# EAGLE board atmega128_devboard (EAGLE 6.4), part 1 of 4
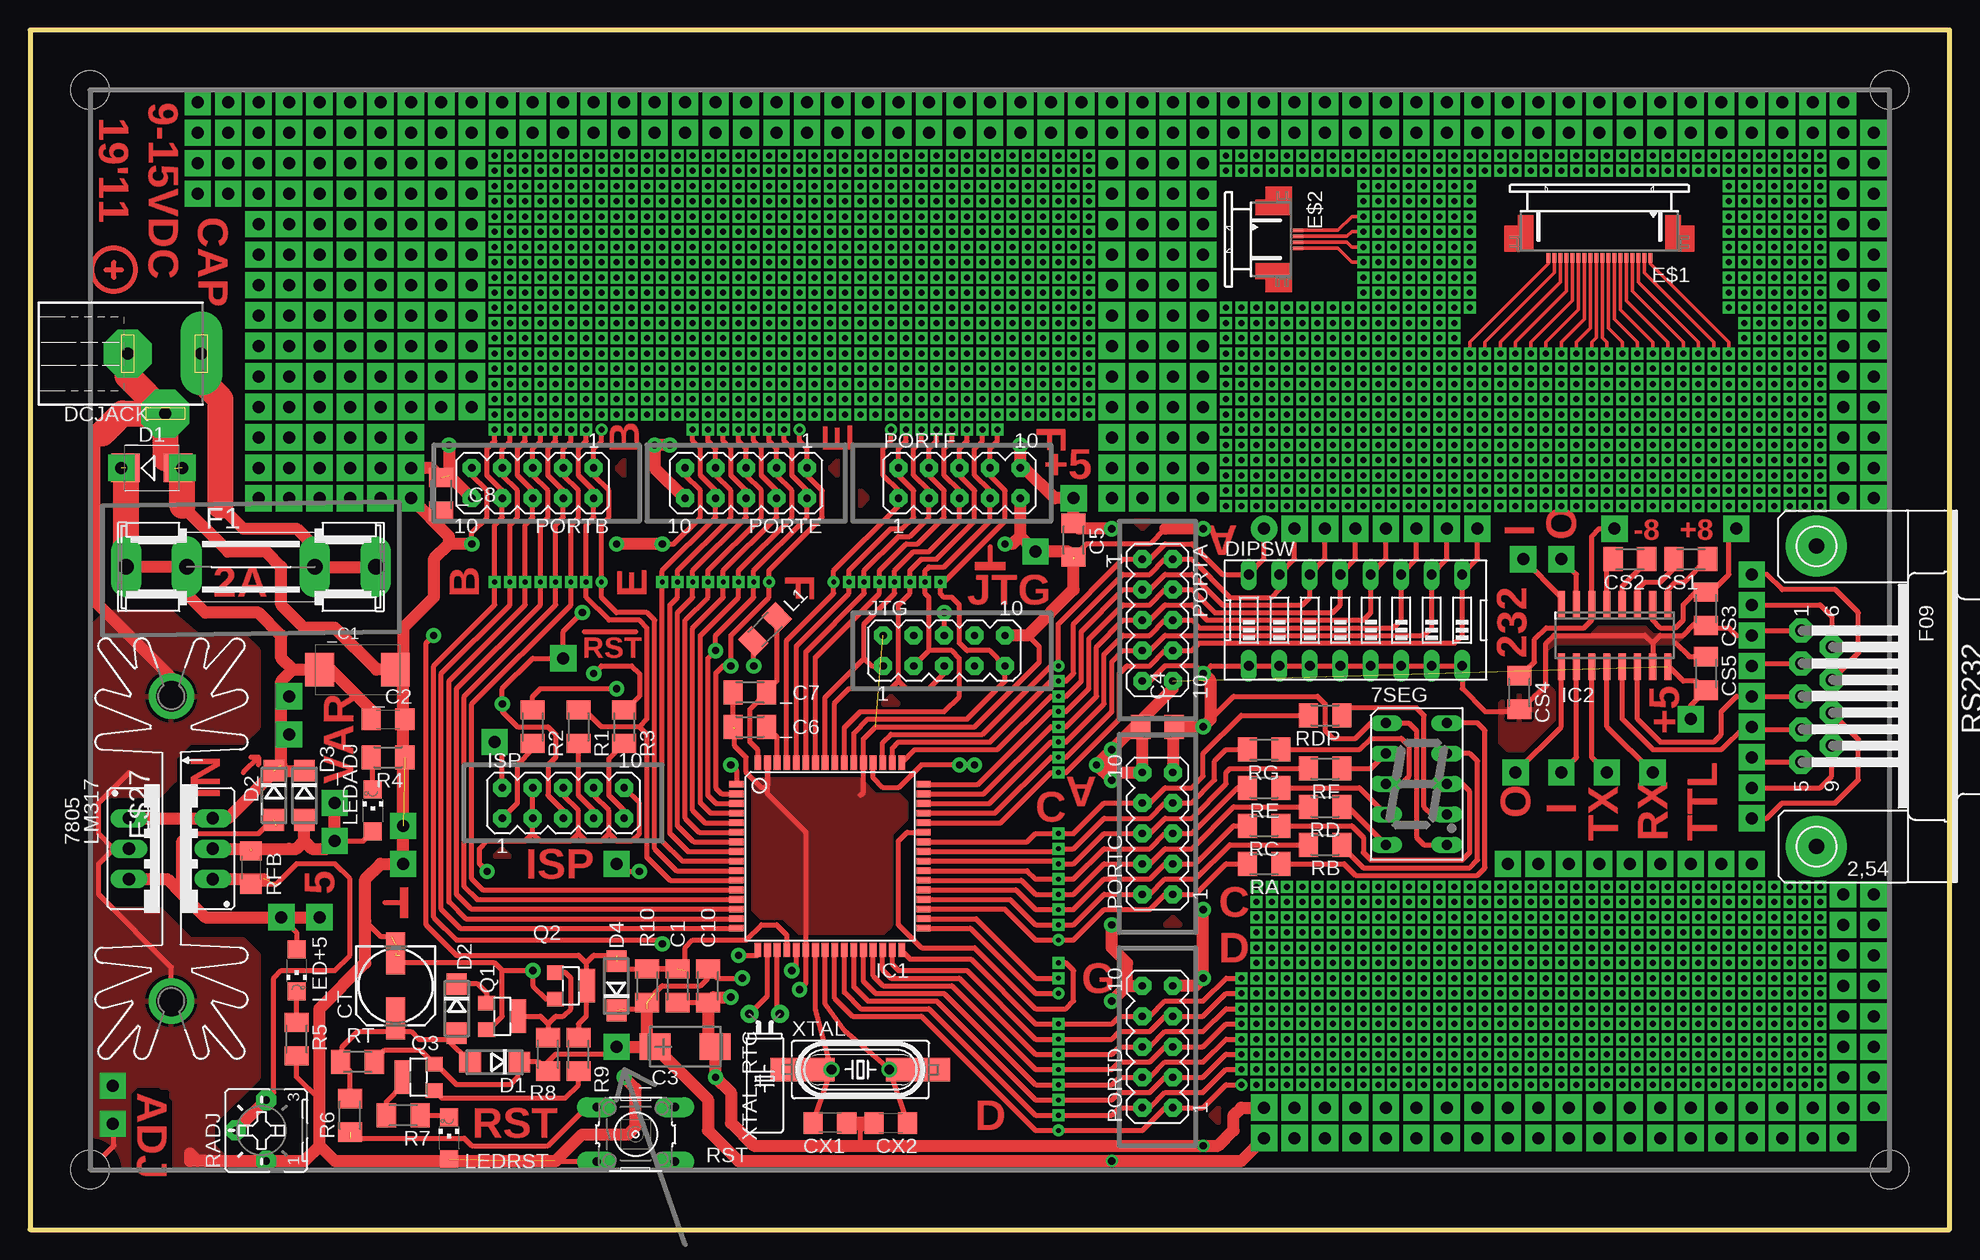
[diagram p0: board, top side]
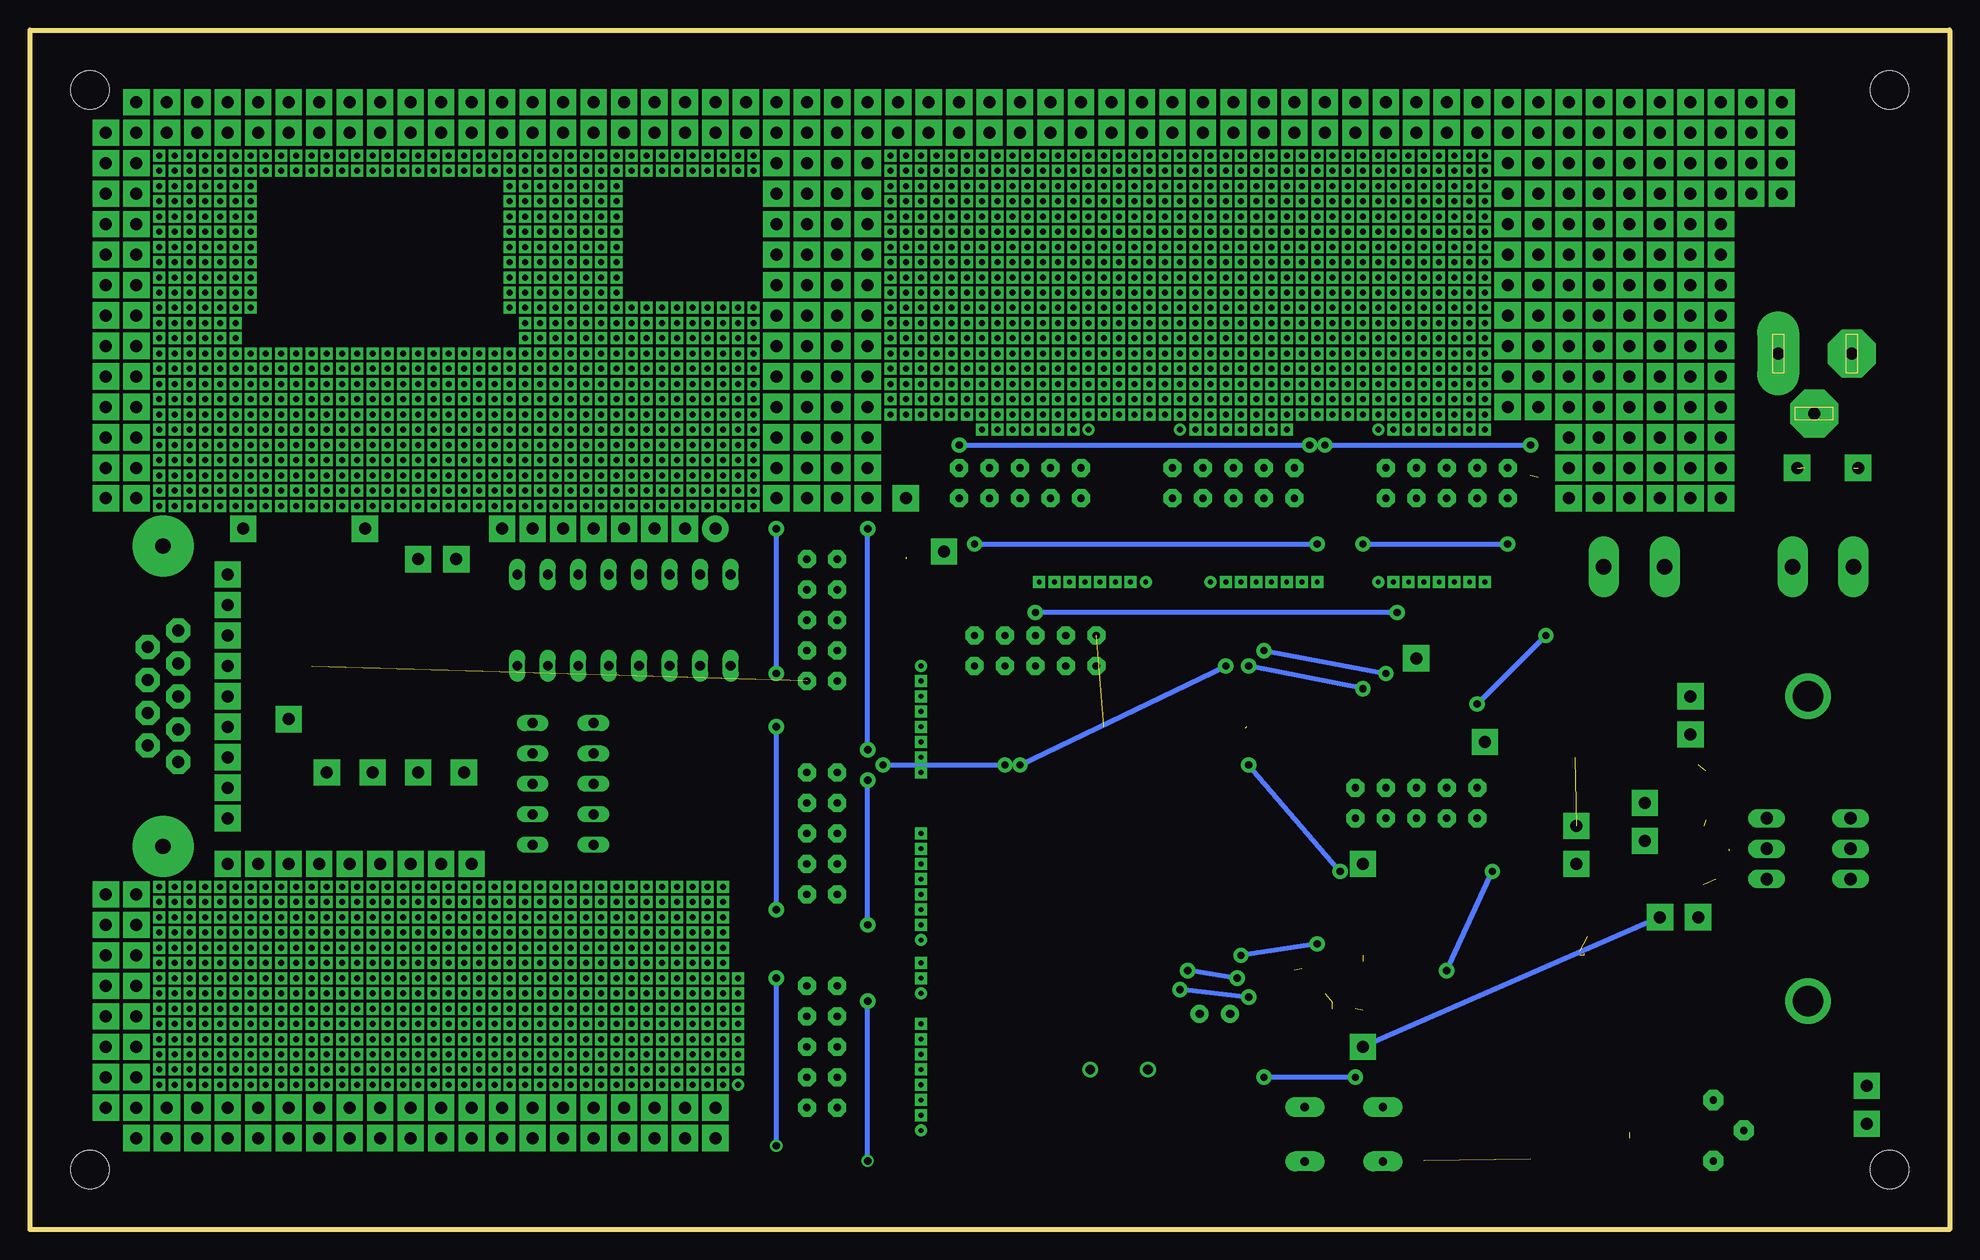
[diagram p1: board, bottom side, seen from below]

Size 160 x 100 mm. Coordinates in mm from the lower left corner, seen from the top.
Outline: 0,0 160,0 160,100 0,100 0,0
Copper layers (1*16): Top 0.035mm / dielectric 1.5mm / Bottom 0.035mm
Design rules "default *": minimum track width 10mil, minimum drill 24mil, track to track 8mil, track to pad 8mil, pad to pad 8mil, via to via 8mil, smd to smd 8mil, copper to edge 40mil, drill to drill 8mil, minimum pad ring 10mil, minimum via ring 8mil, stop-mask expansion 4mil, vias tented up to drill 0mil, thermal gap 10mil
Holes 3.2 mm at 5,5 155,5 5,95 155,95

## Footprints (pad centres in the part's own frame; a part is rotated, then mirrored left to right if it is on the bottom)
HDSP-A = drill 0.813 long: 1 -2.54,5.08; 2 -2.54,2.54; 3 -2.54,0; 4 -2.54,-2.54; 5 -2.54,-5.08; 6 2.54,-5.08; 7 2.54,-2.54; 8 2.54,0; 9 2.54,2.54; 10 2.54,5.08
78XXS = drill 1.016 long: GND 0,-2.54; IN -2.54,-2.54; OUT 2.54,-2.54
SMC_D = smd 2.4 x 2.8: + -3.15,0; - 3.15,0
C1206 = smd 1.6 x 1.8: 1 -1.4,0; 2 1.4,0
CT6032 = smd 2.6 x 2.2: + -2.5,0; - 2.5,0
M1206 = smd 1.6 x 2: 1 -1.4,0; 2 1.4,0
SMB = smd 2.4 x 2.4: A 2.2,0; C -2.2,0
DO214AC = smd 1.8 x 1.7: A 2.05,0; C -2.05,0
153CLV-0605 = smd 3.5 x 1.6: + 2.7,0; - -2.7,0
733980-62 = drill 1 pad 3.5 long: 1 0,8.57 | drill 1 pad 4 octagon: 2 0,2.42; 3 5,5.57
EDG-08 = drill 0.813 long: 1 -8.89,-3.81; 2 -6.35,-3.81; 3 -3.81,-3.81; 4 -1.27,-3.81; 5 1.27,-3.81; 6 3.81,-3.81; 7 6.35,-3.81; 8 8.89,-3.81; 9 8.89,3.81; 10 6.35,3.81; 11 3.81,3.81; 12 1.27,3.81; 13 -1.27,3.81; 14 -3.81,3.81; 15 -6.35,3.81; 16 -8.89,3.81
52745-1890 = smd 0.3 x 0.8: 1 -4.25,2.5; 2 -3.75,2.5; 3 -3.25,2.5; 4 -2.75,2.5; 5 -2.25,2.5; 6 -1.75,2.5; 7 -1.25,2.5; 8 -0.75,2.5; 9 -0.25,2.5; 10 0.25,2.5; 11 0.75,2.5; 12 1.25,2.5; 13 1.75,2.5; 14 2.25,2.5; 15 2.75,2.5; 16 3.25,2.5; 17 3.75,2.5; 18 4.25,2.5
52745-0490 = smd 0.3 x 0.8: 1 -0.75,2.5; 2 -0.25,2.5; 3 0.25,2.5; 4 0.75,2.5
HC49/S = drill 0.813: 1 -2.413,0; 2 2.413,0
SK104-PAD = drill 2.54 pad 3.81: K1 -12.7,-0.762; K2 12.7,-0.762
SHK20L = drill 1.321 pad 2.54 long: 1A -10.414,0; 1B -5.334,0; 2A 10.414,0; 2B 5.334,0
TQFP64 = smd 1.194 x 0.559: 1 -7.8,6; 2 -7.8,5.2; 3 -7.8,4.4; 4 -7.8,3.6; 5 -7.8,2.8; 6 -7.8,2; 7 -7.8,1.2; 8 -7.8,0.4; 9 -7.8,-0.4; 10 -7.8,-1.2; 11 -7.8,-2; 12 -7.8,-2.8; 13 -7.8,-3.6; 14 -7.8,-4.4; 15 -7.8,-5.2; 16 -7.8,-6; 33 7.8,-6; 34 7.8,-5.2; 35 7.8,-4.4; 36 7.8,-3.6; 37 7.8,-2.8; 38 7.8,-2; 39 7.8,-1.2; 40 7.8,-0.4; 41 7.8,0.4; 42 7.8,1.2; 43 7.8,2; 44 7.8,2.8; 45 7.8,3.6; 46 7.8,4.4; 47 7.8,5.2; 48 7.8,6 | smd 0.559 x 1.194: 17 -6,-7.8; 18 -5.2,-7.8; 19 -4.4,-7.8; 20 -3.6,-7.8; 21 -2.8,-7.8; 22 -2,-7.8; 23 -1.2,-7.8; 24 -0.4,-7.8; 25 0.4,-7.8; 26 1.2,-7.8; 27 2,-7.8; 28 2.8,-7.8; 29 3.6,-7.8; 30 4.4,-7.8; 31 5.2,-7.8; 32 6,-7.8; 49 6,7.8; 50 5.2,7.8; 51 4.4,7.8; 52 3.6,7.8; 53 2.8,7.8; 54 2,7.8; 55 1.2,7.8; 56 0.4,7.8; 57 -0.4,7.8; 58 -1.2,7.8; 59 -2,7.8; 60 -2.8,7.8; 61 -3.6,7.8; 62 -4.4,7.8; 63 -5.2,7.8; 64 -6,7.8
SOIC16N = smd 0.6 x 2.2: 1 -4.445,-2.6; 2 -3.175,-2.6; 3 -1.905,-2.6; 4 -0.635,-2.6; 5 0.635,-2.6; 6 1.905,-2.6; 7 3.175,-2.6; 8 4.445,-2.6; 9 4.445,2.6; 10 3.175,2.6; 11 1.905,2.6; 12 0.635,2.6; 13 -0.635,2.6; 14 -1.905,2.6; 15 -3.175,2.6; 16 -4.445,2.6
MA05-2 = drill 0.6 pad 1.5 octagon: 1 -5.08,-1.27; 2 -5.08,1.27; 3 -2.54,-1.27; 4 -2.54,1.27; 5 0,-1.27; 6 0,1.27; 7 2.54,-1.27; 8 2.54,1.27; 9 5.08,-1.27; 10 5.08,1.27
CHIPLED_1206 = smd 1.5 x 1.5: A 0,-1.75; C 0,1.75
317TS = drill 1.016 long: 1 -2.54,-2.54; 2 0,-2.54; 3 2.54,-2.54
SOT23-W = smd 1.2 x 1.4: 1 -1.1,-1.3; 2 1.1,-1.3 | smd 2.8 x 1.4: 3 0,1.3
B25P = drill 0.6 pad 1.676 octagon: A -2.54,0; E 2.54,0; S 0,2.54
F09HP = drill 1 pad 2 octagon: 1 -5.486,-1.27; 2 -2.743,-1.27; 3 0,-1.27; 4 2.743,-1.27; 5 5.486,-1.27; 6 -4.115,1.27; 7 -1.372,1.27; 8 1.372,1.27; 9 4.115,1.27 | drill 1.27 pad 5.08: G1 -12.522,0; G2 12.522,0
B3F-10XX = drill 0.7 pad 1.65 long: 1 -3.251,2.261; 2 3.251,2.261; 3 -3.251,-2.261; 4 3.251,-2.261
HC49UP = smd 5.334 x 1.93: 1 -4.826,0; 2 4.826,0
TC38H = drill 0.7 pad 1.5: 1 -1.27,0; 2 1.27,0

## Placement (x,y rotation side)
7SEG  [HDSP-A]  115.57,37.15 0 top
7805  [78XXS]  10.79,31.75 270 top
_C1  [SMC_D]  27.3,46.67 0 top
_C2  470  [C1206]  29.84,42.55 0 top
_C3  [CT6032]  54.61,15.24 0 top
_C4  100n  [M1206]  93.98,41.91 0 top
_C5  100n  [M1206]  87,57.47 270 top
_C6  [M1206]  60.01,41.91 180 top
_C7  [M1206]  60.01,44.77 0 top
_C8  100n  [M1206]  34.29,61.28 270 top
_D1  [SMB]  10.16,63.5 0 top
_D2  [DO214AC]  20.32,36.2 270 top
_D3  [DO214AC]  22.86,36.2 270 top
C1  10pF  [M1206]  53.98,20.32 90 top
C10  100n  [M1206]  56.52,20.32 270 top
CS1  100n  [M1206]  138.43,55.88 180 top
CS2  100n  [M1206]  133.35,55.88 180 top
CS3  100n  [M1206]  139.7,51.75 90 top
CS4  100n  [M1206]  124.14,44.77 270 top
CS5  100n  [M1206]  139.7,46.35 90 top
CT  47u  [153CLV-0605]  30.48,20.32 270 top
CX1  [C1206]  66.67,8.89 180 top
CX2  [C1206]  71.75,8.89 0 top
D1  d4  [DO214AC]  38.73,13.97 180 top
D2  d4  [DO214AC]  35.56,18.41 270 top
D4  d4  [DO214AC]  48.9,20.32 90 top
DCJACK  [733980-62]  5.71,73.03 270 top
DIPSW  [EDG-08]  110.49,50.8 0 top
E$1  [52745-1890]  130.81,83.5 180 top
E$2  [52745-0490]  103.19,82.55 270 top
E$6  [HC49/S]  69.22,13.34 180 top
E$27  [SK104-PAD]  12.54,31.75 270 top
F1  [SHK20L]  18.41,55.24 0 top
IC1  MEGA128-A  [TQFP64]  66.67,31.11 0 top
IC2  MAX202  [SOIC16N]  132.08,49.53 180 top
ISP  [MA05-2]  44.45,35.56 0 top
JTG  [MA05-2]  76.2,48.26 0 top
L1  [M1206]  61.28,50.03 45 top
LED+5  [CHIPLED_1206]  22.23,21.59 180 top
LEDADJ  [CHIPLED_1206]  28.57,34.92 0 top
LEDRST  [CHIPLED_1206]  34.92,7.62 0 top
LM317  [317TS]  12.7,31.75 90 top
PORTA  [MA05-2]  93.98,50.8 270 top
PORTB  [MA05-2]  41.91,62.23 180 top
PORTC  [MA05-2]  93.98,33.02 90 top
PORTD  [MA05-2]  93.98,15.24 90 top
PORTE  [MA05-2]  59.69,62.23 180 top
PORTF  [MA05-2]  77.47,62.23 0 top
Q1  BC337  [SOT23-W]  39.37,17.78 270 top
Q2  BC337  [SOT23-W]  45.09,20.32 270 top
Q3  BC327  [SOT23-W]  32.38,12.7 90 top
R1  470  [M1206]  45.72,41.91 90 top
R2  [M1206]  41.91,41.91 90 top
R3  [M1206]  49.53,41.91 90 top
R4  820  [M1206]  29.84,39.37 180 top
R5  270  [M1206]  22.23,15.88 270 top
R6  12  [M1206]  26.67,9.53 270 top
R7  240  [M1206]  31.11,9.53 0 top
R8  4k7  [M1206]  43.18,14.61 270 top
R9  4k7  [M1206]  45.72,14.61 270 top
R10  50k  [M1206]  51.44,20.32 90 top
RA  [M1206]  102.87,30.48 180 top
RADJ  5k  [B25P]  19.68,8.26 90 top
RB  [M1206]  107.95,32.07 180 top
RC  [M1206]  102.87,33.66 180 top
RD  [M1206]  107.95,35.24 180 top
RDP  [M1206]  107.95,42.86 180 top
RE  [M1206]  102.87,36.83 180 top
RF  [M1206]  107.95,38.42 180 top
RFB  470  [C1206]  18.41,30.16 270 top
RG  [M1206]  102.87,40.01 180 top
RS232  [F09HP]  148.91,44.45 270 top
RST  [B3F-10XX]  50.48,7.94 0 top
RT  100k  [M1206]  27.3,13.97 0 top
XTAL  20MHz  [HC49UP]  69.22,13.34 0 top
XTAL_RTC  [TC38H]  61.24,17.98 180 top

## Library data of the parts
7SEG = display-hp
7805 LM317 = v-reg
_C1-_C8 C1 C10 CS1-CS5 CT CX1 CX2 L1 R1-R10 RA RB RC RD RDP RE RF RFB RG RT = rcl
_D1-_D3 D1 D2 D4 Q1-Q3 = diode
DCJACK = con-conrad
DIPSW = special
E$1 E$2 = con-molex
E$6 XTAL_RTC = crystal
E$27 = heatsink
F1 = fuse
IC1 = atmel
IC2 = ref-packages
ISP JTG PORTA PORTB PORTC PORTD PORTE PORTF = con-lstb
LED+5 LEDADJ LEDRST = led
RADJ = pot
RS232 = con-subd
RST = switch-omron
XTAL = SparkFun

## Nets
#PEN: IC1.1
#RST: C1.2 D4.A IC1.20 ISP.5 JTG.6 Q2.3 R9.1 R10.2
AREF: _C6.1 IC1.62
DCD: RS232.5
DTR: RS232.2
GND: 7SEG.1 7SEG.6 7805.GND _C1.- _C3.- _C4.2 _C5.2 _C6.2 _C7.1 _D1.A C1.1 C10.2 CS3.1 CS4.2 CS5.2 CT.- CX1.1 CX2.1 DCJACK.2 DCJACK.3 DIPSW.1 DIPSW.2 DIPSW.3 DIPSW.4 DIPSW.5 DIPSW.6 DIPSW.7 DIPSW.8 E$27.K1 E$27.K2 IC1.22 IC1.53 IC1.63 IC2.15 ISP.3 ISP.4 ISP.6 ISP.8 ISP.10 JTG.2 JTG.10 LEDRST.A PORTA.9 PORTB.9 PORTC.9 PORTD.9 PORTE.9 PORTF.9 Q1.2 Q2.2 R4.1 R5.2 RADJ.A RS232.1 RST.3
MISO: ISP.9 R3.1
MOSI: ISP.1 R2.1
PB0: IC1.10
PB1: IC1.11 PORTB.2 R1.2
PB2: IC1.12 PORTB.3
PB3: IC1.13 PORTB.4
PB4: IC1.14 PORTB.5
PB5: IC1.15 PORTB.6
PB6: IC1.16 PORTB.7
PB7: IC1.17 PORTB.8
PE0: IC1.2 PORTE.1 R2.2
PE1: IC1.3 PORTE.2 R3.2
PE2: IC1.4 PORTE.3
PE3: IC1.5 PORTE.4
PE4: IC1.6 PORTE.5
PE5: IC1.7 PORTE.6
PE6: IC1.8 PORTE.7
PE7: IC1.9 PORTE.8
PG0: IC1.33
PG1: IC1.34
PG2: IC1.43
RX_TTL: IC2.12
S$1: CX1.2 E$6.2 IC1.23
S$2: CX2.2 E$6.1 IC1.24
S$3: IC1.19 XTAL_RTC.1
S$4: IC1.18 XTAL_RTC.2
S$6: PORTD.1
S$8: IC1.59 PORTF.3
S$9: IC1.60 PORTF.2
S$11: PORTC.7 RG.2
S$23: LM317.1 RADJ.E RADJ.S RFB.2
S$27: _C7.2 IC1.64 L1.2
S$44: DIPSW.9 IC1.44 PORTA.8
S$47: DIPSW.13 IC1.48 PORTA.4
S$55: E$1.1
S$56: E$1.2
S$57: PORTC.6 RF.2
S$58: IC1.57 JTG.1 PORTF.5
S$59: IC1.56 JTG.5 PORTF.6
S$60: IC1.55 JTG.3 PORTF.7
S$61: IC1.54 JTG.9 PORTF.8
S$62: IC1.26
S$63: IC1.25
S$64: IC1.27
S$65: IC1.28
S$66: IC1.29
S$67: IC1.32
S$68: IC1.31
S$69: IC1.30
S$70: IC1.35
S$71: IC1.36
S$72: IC1.37
S$73: IC1.38
S$74: IC1.39
S$75: IC1.40
S$76: IC1.41
S$77: IC1.42
S$78: DIPSW.10 IC1.45 PORTA.7
S$82: DCJACK.1 F1.2A F1.2B
S$83: 7805.IN _C1.+ _C2.1 _D1.C _D2.C _D3.C F1.1A F1.1B LM317.3
S$85: DIPSW.11 IC1.46 PORTA.6
S$86: DIPSW.12 IC1.47 PORTA.5
S$87: PORTC.5 RE.2
S$88: PORTC.4 RD.2
S$89: PORTC.3 RC.2
S$90: PORTC.2 RB.2
S$91: PORTC.1 RA.2
S$92: IC1.61 PORTF.1
S$93: E$1.3
S$99: IC1.58 PORTF.4
S$100: PORTC.8 RDP.2
S$101: PORTD.2
S$102: PORTD.3
S$103: PORTD.4
S$104: PORTD.5
S$105: PORTD.6
S$106: PORTD.7
S$108: E$1.4
S$109: PORTD.8
S$110: Q1.3 Q2.1 R8.1
S$117: CT.+ D1.A D2.A R6.1 RT.1
S$128: E$1.5
S$130: E$1.6
S$131: E$1.7
S$138: IC2.13 RS232.4
S$139: IC2.14 RS232.3
S$140: CS1.1 IC2.1
S$141: CS1.2 IC2.3
S$167: LED+5.C R5.1
S$168: R6.2 RST.1
S$169: LEDRST.C R7.2
S$170: E$1.8
S$174: E$1.9
S$176: CS2.1 IC2.4
S$177: CS2.2 IC2.5
S$178: CS3.2 IC2.2
S$179: CS4.1 IC2.6
S$181: RS232.7
S$183: RS232.6
S$184: RS232.8
S$185: IC2.8
S$192: RS232.9
S$240: E$1.10
S$242: E$1.11
S$243: E$1.12
S$244: E$1.13
S$245: E$1.14
S$246: E$1.15
S$247: E$1.16
S$248: E$1.17
S$249: E$1.18
S$250: E$2.1
S$251: E$2.2
S$252: E$2.3
S$253: E$2.4
S$257: DIPSW.16 IC1.51 PORTA.1
S$258: IC2.7
S$260: DIPSW.15 IC1.50 PORTA.2
S$261: DIPSW.14 IC1.49 PORTA.3
S$277: LEDADJ.C R4.2
S$283: Q3.1 R9.2
S$285: Q3.3 R7.1
S$296: IC2.10
S$297: IC2.9
S$302: _D3.A LEDADJ.A LM317.2 RFB.1
S$307: 7SEG.10 RA.1
S$308: 7SEG.9 RB.1
S$309: 7SEG.7 RDP.1
S$310: 7SEG.8 RC.1
S$311: 7SEG.5 RD.1
S$312: 7SEG.4 RE.1
S$313: 7SEG.2 RF.1
S$314: 7SEG.3 RG.1
S$497: D2.C Q1.1
SCK: ISP.7 R1.1
TX_TTL: IC2.11
VCC: 7805.OUT _C3.+ _C4.1 _C5.1 _C8.1 _D2.A C10.1 CS5.1 D1.C D4.C IC1.21 IC1.52 IC2.16 L1.1 LED+5.A PORTA.10 PORTB.10 PORTC.10 PORTD.10 PORTE.10 PORTF.10 Q3.2 R8.2 R10.1 RT.2
VTG: ISP.2

## Tracks (layer width: path | path; a pad name or v marks a point on that pad's centre or on a via)
#PEN  (via drill 0.6 pad 1.27, 1 pad 2.18)
  Top 0.406: IC1.1 58.88,38.28 v58.42,38.73 | v50.8,29.84 49.53,29.84 v48.9,30.48
  Bottom 0.406: v50.8,29.84 v58.42,38.73
#RST  (via drill 0.6 pad 1.27, 1 pad 2.18)  (2 unrouted)
  Top 0.406: IC1.20 63.08,24.55 62.23,25.4 60.96,25.4 59.69,24.13 55.24,24.13 54.61,23.5 54.61,21.59 | ISP.5 44.45,34.92 43.18,36.2 43.18,38.73 43.81,39.37 43.81,41.27 43.18,41.91 40.64,41.91 39.37,43.18 v39.37,43.81 39.37,45.09 41.91,47.62 v44.45,47.62 44.45,49.85 v46.04,51.44 | v76.2,51.44 JTG.6 | R9.1 45.72,17.14 46.35,17.78 46.35,20.29 Q2.3 46.38,20.93 46.35,20.95 46.35,22.23 | R10.2 C1.2 49.55,21.72 D4.A | 48.9,22.86 46.99,22.86 46.35,22.23 | 46.35,22.23 45.72,22.86 35.56,22.86 33.02,25.4 33.02,48.9 v33.66,49.53
  Bottom 0.406: v46.04,51.44 v76.2,51.44 | v33.66,49.53 v39.37,43.81
AREF
  Top 0.406: IC1.62 62.27,41.04 _C6.1
DCD
  Top 0.406: RS232.5 143.92,38.96 143.51,39.37
DTR
  Top 0.406: RS232.2 143.71,47.19 143.51,46.99
GND  (via drill 0.6, 0.6 pad 1.27, 1 pad 2.18)  (10 unrouted)
  Top 0.406: PORTB.9 36.83,62.87 38.1,61.59 38.1,59.37 36.83,58.1 v36.83,57.15 | 69.22,36.2 69.47,36.45 IC1.53 69.47,40.9 70.48,41.91 78.74,41.91 84.14,47.31 84.14,48.58 83.19,49.53 | PORTE.9 54.61,62.87 55.88,61.59 55.88,59.37 53.66,57.15 v52.7,57.15 | 135.25,48.9 135.89,49.53 137.79,49.53 138.75,50.48 138.94,50.48 CS3.1 139.89,50.16 141.6,50.16 142.24,49.53 v143.51,49.53 143.92,49.94 RS232.1 | 135.25,48.9 IC2.15 | 135.25,48.9 134.62,49.53 127,49.53 126.36,48.9 126.36,45.27 CS4.2 123.95,43.18 121.28,43.18 119.38,45.09 DIPSW.8 DIPSW.7 DIPSW.6 DIPSW.5 DIPSW.4 DIPSW.3 DIPSW.2 DIPSW.1 98.42,46.99 v97.79,46.35 97.16,46.99 94.61,46.99 93.34,45.72 PORTA.9 | 7SEG.6 116.2,32.07 115.57,32.7 115.57,41.59 114.94,42.23 7SEG.1 111.76,42.23 110.49,40.96 108.58,40.96 107.95,41.59 107.95,43.81 107.31,44.45 100.33,44.45 v97.79,41.91 | _C5.2 88.08,57.15 93.34,57.15 94.61,58.42 | Q2.2 43.01,19.22 41.91,20.32 v41.91,21.59 39.37,21.59 | Q1.2 38.27,16.68 39.37,17.78 39.37,21.59 | 69.22,8.26 69.85,8.89 | 69.22,8.26 68.58,8.89 | 69.22,6.99 69.22,8.26 | 39.37,21.59 38.73,22.23 31.11,22.23 30.48,22.86 | 57.15,15.28 _C3.- | 30.8,22.86 30.8,23.18 | 30.16,24.45 29.21,24.45 27.94,25.72 | RST.3 43.85,5.68 43.81,5.71 | R5.2 22.23,12.7 24.13,10.79 | 8.26,38.1 5.71,35.56 5.71,33.02 6.99,31.75 | 6.99,31.75 7805.GND | 6.99,31.75 5.71,30.48 5.71,27.94 11.78,21.87 E$27.K2 | _C6.2 _C7.1 | 58.74,41.78 58.74,40.32 59.69,39.37 59.69,38.1 60.96,36.83 61.28,36.83 61.48,37.03 IC1.63 61.48,36.31 64.67,33.12 IC1.22 64.67,20.54 v64.14,20 | C1.1 C10.2 | CS5.2 138.3,47.76 137.16,48.9 | 45.72,33.02 45.72,34.92 44.45,36.2 ISP.6
  Top 0.406: ISP.10 50.8,35.56 50.8,33.02 50.16,32.38 48.9,32.38 48.26,33.02 | 45.72,33.02 46.35,32.38 47.62,32.38 48.26,33.02 | ISP.8 46.99,36.2 48.26,34.92 48.26,33.02 | 41.91,33.02 42.55,32.38 45.09,32.38 45.72,33.02 | 41.91,33.02 41.27,32.38 38.1,32.38 37.47,31.75 37.47,30.48 v38.1,29.84 | ISP.4 ISP.3 41.91,33.02 | 5.08,5.08 6.99,6.99 6.99,9.53
  Top 1.016: 31.11,46.99 31.11,50.16 33.66,52.7 33.66,55.88 34.92,57.15 | v31.75,60.96 34.92,57.78 34.92,57.15 | v36.83,57.15 34.92,57.15 | v52.7,57.15 v48.9,57.15 | v81.28,57.15 81.92,57.15 82.55,57.78 | JTG.10 83.19,49.53 87,53.34 87,55.88 | 82.55,57.78 PORTF.9 | 82.55,57.78 v83.82,56.52 86.55,56.52 _C5.2 | v97.79,58.42 94.61,58.42 | 11.29,64.28 12.06,63.5 | v97.79,46.35 98.42,45.72 98.42,42.55 v97.79,41.91 _C4.2 95.25,41.78 PORTC.9 | v102.87,10.16 100.97,10.16 100.33,9.53 100.33,8.26 99.06,6.99 v97.79,6.99 69.22,6.99 60.33,6.99 58.42,8.89 58.42,11.43 v57.15,12.7 57.15,15.28 | 12.7,60.33 16.51,56.52 19.68,56.52 20.95,55.24 20.95,52.07 22.86,50.16 25.4,50.16 28.89,46.67 _C1.- 31.11,46.04 v31.11,33.66 v31.11,30.48 29.21,30.48 27.94,29.21 27.94,25.72 27.94,22.23 24.13,18.41 24.13,10.79 24.13,6.99 | PORTD.9 97.16,20.32 v97.79,20.95 v97.79,26.67 | CX1.1 68.58,8.89 69.85,8.89 CX2.1 | v49.53,12.7 50.48,11.75 50.48,8.57 49.85,7.94 46.04,7.94 43.81,5.71 25.4,5.71 24.13,6.99 | 24.13,6.99 22.86,5.71 RADJ.A 14.61,5.71 13.97,5.71 | 5.4,66.36 5.4,52.39 11.75,46.03 11.75,44.76 | v58.42,19.37 56.96,19.37 C10.2 56.52,15.88 | 13.97,5.71 13.34,6.35 13.34,5.71 13.97,5.71
  Top 2.184: 6.03,66.36 7.7,68.03 DCJACK.3 | DCJACK.2 8.13,71.17 DCJACK.3 | DCJACK.3 11.29,64.28 | _D1.A 12.7,63.16 12.7,60.33
  Bottom 0.406: v48.9,57.15 v36.83,57.15 | v81.28,57.15 v52.7,57.15 | v97.79,46.35 v97.79,58.42 | v97.79,26.67 v97.79,41.91 | v41.91,21.59 v38.1,29.84 | v97.79,6.99 v97.79,20.95 | v49.53,12.7 v57.15,12.7 | v58.42,19.37 v64.14,20
  other vias: 6.91,8.81 6.91,11.98 12.7,63.5
  pour Top (no thermals): 70.48,36.2 69.22,37.47 60.96,37.47 60.33,36.83 60.33,26.67 60.96,26.04 62.87,26.04 64.14,24.77 71.12,24.77 71.75,25.4 71.75,33.02 73.03,34.29 73.03,35.56 72.39,36.2
  pour Top: 11.75,51.44 6.35,51.44 5.08,50.16 5.08,37.47 6.35,36.2 10.79,36.2 12.06,37.47 12.06,39.37 13.34,40.64 17.78,40.64 19.05,41.91 19.05,48.26 17.78,49.53 13.97,49.53
  pour Top: 5.08,37.47 5.08,6.35 6.35,5.08 8.26,5.08 8.26,11.43 8.89,12.06 10.79,12.06 12.06,10.79 12.06,5.08 17.14,5.08 15.24,6.99 15.24,8.89 19.05,12.7 19.05,22.86 17.78,24.13 13.34,24.13 10.79,26.67 6.99,26.67 5.71,27.94 5.71,30.48 6.99,31.75 5.71,33.02 5.71,35.56 6.35,36.2
  pour Top: 130.18,49.53 130.81,50.16 134.62,50.16 135.25,49.53 137.79,49.53 137.16,48.9 127,48.9 126.36,48.26 126.36,48.9 127,49.53
  pour Top: 123.19,44.45 122.56,43.81 122.56,40.64 123.19,40.01 124.46,40.01 127,42.55 127,44.77 126.36,45.4 125.41,44.45
GND1  (via drill 1 pad 2.18)
  other vias: 105.41,10.16
GND2  (via drill 1 pad 2.18)
  other vias: 107.95,10.16
GND3  (via drill 1 pad 2.18)
  other vias: 110.49,10.16
GND5  (via drill 1 pad 2.18)
  other vias: 115.57,10.16
GND13  (via drill 1 pad 2.18)
  other vias: 120.65,10.16
GND14  (via drill 1 pad 2.18)
  other vias: 153.67,27.94
GND15  (via drill 1 pad 2.18)
  other vias: 153.67,25.4
GND16  (via drill 1 pad 2.18)
  other vias: 153.67,22.86
GND17  (via drill 1 pad 2.18)
  other vias: 153.67,20.32
GND18  (via drill 1 pad 2.18)
  other vias: 128.27,10.16
GND19  (via drill 1 pad 2.18)
  other vias: 153.67,17.78
GND20  (via drill 1 pad 2.18)
  other vias: 153.67,15.24
GND22  (via drill 1 pad 2.18)
  other vias: 148.59,10.16
GND23  (via drill 1 pad 2.18)
  other vias: 128.27,7.62
GND24  (via drill 1 pad 2.18)
  other vias: 148.59,7.62
GND56  (via drill 1 pad 2.18)
  other vias: 135.89,7.62
GND65  (via drill 1 pad 2.18)
  other vias: 138.43,7.62
GND74  (via drill 1 pad 2.18)
  other vias: 140.97,7.62
GND83  (via drill 1 pad 2.18)
  other vias: 143.51,7.62
GND92  (via drill 1 pad 2.18)
  other vias: 97.79,73.66
GND93  (via drill 1 pad 2.18)
  other vias: 97.79,71.12
GND94  (via drill 1 pad 2.18)
  other vias: 97.79,68.58
GND95  (via drill 1 pad 2.18)
  other vias: 97.79,66.04
GND96  (via drill 1 pad 2.18)
  other vias: 97.79,78.74
GND97  (via drill 1 pad 2.18)
  other vias: 97.79,76.2
GND98  (via drill 1 pad 2.18)
  other vias: 92.71,73.66
GND99  (via drill 1 pad 2.18)
  other vias: 92.71,71.12
GND100  (via drill 1 pad 2.18)
  other vias: 92.71,68.58
GND101  (via drill 1 pad 2.18)
  other vias: 92.71,66.04
GND102  (via drill 1 pad 2.18)
  other vias: 92.71,78.74
GND103  (via drill 1 pad 2.18)
  other vias: 92.71,76.2
GND104  (via drill 1 pad 2.18)
  other vias: 97.79,63.5
GND105  (via drill 1 pad 2.18)
  other vias: 97.79,60.96
GND106  (via drill 1 pad 2.18)
  other vias: 92.71,63.5
MISO
  Top 0.406: ISP.9 49.53,34.92 48.26,36.2 48.26,39.24 R3.1
MOSI
  Top 0.406: ISP.1 40.64,35.56 40.64,38.73 41.91,40.01 R2.1
N$1  (via drill 0.5 pad 1)
  other vias: 76.83,70.48
N$2  (via drill 0.5 pad 1)
  other vias: 78.11,70.48
N$3  (via drill 0.5 pad 1)
  other vias: 78.11,71.75
N$4  (via drill 0.5 pad 1)
  other vias: 76.83,71.75
N$5  (via drill 0.5 pad 1)
  other vias: 76.83,73.03
N$6  (via drill 0.5 pad 1)
  other vias: 78.11,73.03
N$7  (via drill 0.5 pad 1)
  other vias: 78.11,74.3
N$8  (via drill 0.5 pad 1)
  other vias: 76.83,74.3
N$9  (via drill 0.5 pad 1)
  other vias: 76.83,75.56
N$10  (via drill 0.5 pad 1)
  other vias: 78.11,75.56
N$11  (via drill 0.5 pad 1)
  other vias: 78.11,76.83
N$12  (via drill 0.5 pad 1)
  other vias: 76.83,76.83
N$13  (via drill 0.5 pad 1)
  other vias: 76.83,78.11
N$14  (via drill 0.5 pad 1)
  other vias: 78.11,78.11
N$15  (via drill 0.5 pad 1)
  other vias: 78.11,79.38
N$16  (via drill 0.5 pad 1)
  other vias: 76.83,79.38
N$17  (via drill 0.5 pad 1)
  other vias: 76.83,80.64
N$18  (via drill 0.5 pad 1)
  other vias: 78.11,80.64
N$19  (via drill 0.5 pad 1)
  other vias: 78.11,81.92
N$20  (via drill 0.5 pad 1)
  other vias: 76.83,81.92
N$21  (via drill 0.5 pad 1)
  other vias: 76.83,83.19
N$22  (via drill 0.5 pad 1)
  other vias: 78.11,83.19
N$23  (via drill 0.5 pad 1)
  other vias: 78.11,84.45
N$24  (via drill 0.5 pad 1)
  other vias: 76.83,84.45
N$25  (via drill 0.5 pad 1)
  other vias: 79.38,70.48
N$26  (via drill 0.5 pad 1)
  other vias: 80.64,70.48
N$27  (via drill 0.5 pad 1)
  other vias: 80.64,71.75
N$28  (via drill 0.5 pad 1)
  other vias: 79.38,71.75
N$29  (via drill 0.5 pad 1)
  other vias: 79.38,73.03
N$30  (via drill 0.5 pad 1)
  other vias: 80.64,73.03
N$31  (via drill 0.5 pad 1)
  other vias: 80.64,74.3
N$32  (via drill 0.5 pad 1)
  other vias: 79.38,74.3
N$33  (via drill 0.5 pad 1)
  other vias: 81.92,70.48
N$34  (via drill 0.5 pad 1)
  other vias: 83.19,70.48
N$35  (via drill 0.5 pad 1)
  other vias: 84.45,70.48
N$36  (via drill 0.5 pad 1)
  other vias: 85.72,70.48
N$37  (via drill 0.5 pad 1)
  other vias: 85.72,71.75
N$38  (via drill 0.5 pad 1)
  other vias: 84.45,71.75
N$39  (via drill 0.5 pad 1)
  other vias: 83.19,71.75
N$40  (via drill 0.5 pad 1)
  other vias: 81.92,71.75
N$41  (via drill 0.5 pad 1)
  other vias: 87,70.48
N$42  (via drill 0.5 pad 1)
  other vias: 88.27,70.48
N$43  (via drill 0.5 pad 1)
  other vias: 81.92,73.03
N$44  (via drill 0.5 pad 1)
  other vias: 83.19,73.03
N$45  (via drill 0.5 pad 1)
  other vias: 84.45,73.03
N$46  (via drill 0.5 pad 1)
  other vias: 85.72,73.03
N$47  (via drill 0.5 pad 1)
  other vias: 85.72,74.3
N$48  (via drill 0.5 pad 1)
  other vias: 88.27,71.75
N$49  (via drill 0.5 pad 1)
  other vias: 84.45,74.3
N$50  (via drill 0.5 pad 1)
  other vias: 83.19,74.3
N$51  (via drill 0.5 pad 1)
  other vias: 81.92,74.3
N$52  (via drill 0.5 pad 1)
  other vias: 79.38,75.56
N$53  (via drill 0.5 pad 1)
  other vias: 80.64,75.56
N$54  (via drill 0.5 pad 1)
  other vias: 80.64,76.83
N$55  (via drill 0.5 pad 1)
  other vias: 79.38,76.83
N$56  (via drill 0.5 pad 1)
  other vias: 79.38,78.11
N$57  (via drill 0.5 pad 1)
  other vias: 80.64,78.11
N$58  (via drill 0.5 pad 1)
  other vias: 80.64,79.38
N$59  (via drill 0.5 pad 1)
  other vias: 79.38,79.38
N$60  (via drill 0.5 pad 1)
  other vias: 81.92,75.56
N$61  (via drill 0.5 pad 1)
  other vias: 83.19,75.56
N$62  (via drill 0.5 pad 1)
  other vias: 84.45,75.56
N$63  (via drill 0.5 pad 1)
  other vias: 85.72,75.56
N$64  (via drill 0.5 pad 1)
  other vias: 85.72,76.83
N$65  (via drill 0.5 pad 1)
  other vias: 84.45,76.83
N$66  (via drill 0.5 pad 1)
  other vias: 83.19,76.83
N$67  (via drill 0.5 pad 1)
  other vias: 81.92,76.83
N$68  (via drill 0.5 pad 1)
  other vias: 81.92,78.11
N$69  (via drill 0.5 pad 1)
  other vias: 83.19,78.11
N$70  (via drill 0.5 pad 1)
  other vias: 84.45,78.11
N$71  (via drill 0.5 pad 1)
  other vias: 85.72,78.11
N$72  (via drill 0.5 pad 1)
  other vias: 85.72,79.38
N$73  (via drill 0.5 pad 1)
  other vias: 84.45,79.38
N$74  (via drill 0.5 pad 1)
  other vias: 83.19,79.38
N$75  (via drill 0.5 pad 1)
  other vias: 81.92,79.38
N$76  (via drill 0.5 pad 1)
  other vias: 79.38,80.64
N$77  (via drill 0.5 pad 1)
  other vias: 80.64,80.64
N$78  (via drill 0.5 pad 1)
  other vias: 80.64,81.92
N$79  (via drill 0.5 pad 1)
  other vias: 79.38,81.92
N$80  (via drill 0.5 pad 1)
  other vias: 79.38,83.19
N$81  (via drill 0.5 pad 1)
  other vias: 80.64,83.19
N$82  (via drill 0.5 pad 1)
  other vias: 80.64,84.45
N$83  (via drill 0.5 pad 1)
  other vias: 79.38,84.45
N$84  (via drill 0.5 pad 1)
  other vias: 81.92,80.64
N$85  (via drill 0.5 pad 1)
  other vias: 83.19,80.64
N$86  (via drill 0.5 pad 1)
  other vias: 84.45,80.64
N$87  (via drill 0.5 pad 1)
  other vias: 85.72,80.64
N$88  (via drill 0.5 pad 1)
  other vias: 85.72,81.92
N$89  (via drill 0.5 pad 1)
  other vias: 38.73,70.48
N$90  (via drill 0.5 pad 1)
  other vias: 40.01,70.48
N$91  (via drill 0.5 pad 1)
  other vias: 40.01,71.75
N$92  (via drill 0.5 pad 1)
  other vias: 38.73,71.75
N$93  (via drill 0.5 pad 1)
  other vias: 38.73,73.03
N$94  (via drill 0.5 pad 1)
  other vias: 40.01,73.03
N$95  (via drill 0.5 pad 1)
  other vias: 40.01,74.3
N$96  (via drill 0.5 pad 1)
  other vias: 38.73,74.3
N$97  (via drill 0.5 pad 1)
  other vias: 41.27,70.48
N$98  (via drill 0.5 pad 1)
  other vias: 42.55,70.48
N$99  (via drill 0.5 pad 1)
  other vias: 43.81,70.48
N$100  (via drill 0.5 pad 1)
  other vias: 45.09,70.48
N$101  (via drill 0.5 pad 1)
  other vias: 45.09,71.75
N$102  (via drill 0.5 pad 1)
  other vias: 43.81,71.75
N$103  (via drill 0.5 pad 1)
  other vias: 42.55,71.75
N$104  (via drill 0.5 pad 1)
  other vias: 41.27,71.75
N$105  (via drill 0.5 pad 1)
  other vias: 41.27,73.03
N$106  (via drill 0.5 pad 1)
  other vias: 42.55,73.03
N$107  (via drill 0.5 pad 1)
  other vias: 43.81,73.03
N$108  (via drill 0.5 pad 1)
  other vias: 45.09,73.03
N$109  (via drill 0.5 pad 1)
  other vias: 45.09,74.3
N$110  (via drill 0.5 pad 1)
  other vias: 43.81,74.3
N$111  (via drill 0.5 pad 1)
  other vias: 42.55,74.3
N$112  (via drill 0.5 pad 1)
  other vias: 41.27,74.3
N$113  (via drill 0.5 pad 1)
  other vias: 38.73,75.56
N$114  (via drill 0.5 pad 1)
  other vias: 40.01,75.56
N$115  (via drill 0.5 pad 1)
  other vias: 40.01,76.83
N$116  (via drill 0.5 pad 1)
  other vias: 38.73,76.83
N$117  (via drill 0.5 pad 1)
  other vias: 38.73,78.11
N$118  (via drill 0.5 pad 1)
  other vias: 40.01,78.11
N$119  (via drill 0.5 pad 1)
  other vias: 40.01,79.38
N$120  (via drill 0.5 pad 1)
  other vias: 38.73,79.38
N$121  (via drill 0.5 pad 1)
  other vias: 41.27,75.56
N$122  (via drill 0.5 pad 1)
  other vias: 42.55,75.56
N$123  (via drill 0.5 pad 1)
  other vias: 43.81,75.56
N$124  (via drill 0.5 pad 1)
  other vias: 45.09,75.56
N$125  (via drill 0.5 pad 1)
  other vias: 45.09,76.83
N$126  (via drill 0.5 pad 1)
  other vias: 43.81,76.83
N$127  (via drill 0.5 pad 1)
  other vias: 42.55,76.83
N$128  (via drill 0.5 pad 1)
  other vias: 41.27,76.83
N$129  (via drill 0.5 pad 1)
  other vias: 41.27,78.11
N$130  (via drill 0.5 pad 1)
  other vias: 42.55,78.11
N$131  (via drill 0.5 pad 1)
  other vias: 43.81,78.11
N$132  (via drill 0.5 pad 1)
  other vias: 45.09,78.11
N$133  (via drill 0.5 pad 1)
  other vias: 45.09,79.38
N$134  (via drill 0.5 pad 1)
  other vias: 43.81,79.38
N$135  (via drill 0.5 pad 1)
  other vias: 42.55,79.38
N$136  (via drill 0.5 pad 1)
  other vias: 41.27,79.38
N$137  (via drill 0.5 pad 1)
  other vias: 38.73,80.64
N$138  (via drill 0.5 pad 1)
  other vias: 40.01,80.64
N$139  (via drill 0.5 pad 1)
  other vias: 40.01,81.92
N$140  (via drill 0.5 pad 1)
  other vias: 38.73,81.92
N$141  (via drill 0.5 pad 1)
  other vias: 38.73,83.19
N$142  (via drill 0.5 pad 1)
  other vias: 40.01,83.19
N$143  (via drill 0.5 pad 1)
  other vias: 40.01,84.45
N$144  (via drill 0.5 pad 1)
  other vias: 38.73,84.45
N$145  (via drill 0.5 pad 1)
  other vias: 41.27,80.64
N$146  (via drill 0.5 pad 1)
  other vias: 42.55,80.64
N$147  (via drill 0.5 pad 1)
  other vias: 43.81,80.64
N$148  (via drill 0.5 pad 1)
  other vias: 45.09,80.64
N$149  (via drill 0.5 pad 1)
  other vias: 45.09,81.92
N$150  (via drill 0.5 pad 1)
  other vias: 43.81,81.92
N$151  (via drill 0.5 pad 1)
  other vias: 42.55,81.92
N$152  (via drill 0.5 pad 1)
  other vias: 41.27,81.92
N$153  (via drill 0.5 pad 1)
  other vias: 41.27,83.19
N$154  (via drill 0.5 pad 1)
  other vias: 42.55,83.19
N$155  (via drill 0.5 pad 1)
  other vias: 43.81,83.19
N$156  (via drill 0.5 pad 1)
  other vias: 45.09,83.19
N$157  (via drill 0.5 pad 1)
  other vias: 45.09,84.45
N$158  (via drill 0.5 pad 1)
  other vias: 43.81,84.45
N$159  (via drill 0.5 pad 1)
  other vias: 42.55,84.45
N$160  (via drill 0.5 pad 1)
  other vias: 41.27,84.45
N$161  (via drill 0.5 pad 1)
  other vias: 84.45,81.92
N$162  (via drill 0.5 pad 1)
  other vias: 83.19,81.92
N$163  (via drill 0.5 pad 1)
  other vias: 81.92,81.92
N$164  (via drill 0.5 pad 1)
  other vias: 81.92,83.19
N$165  (via drill 0.5 pad 1)
  other vias: 83.19,83.19
N$166  (via drill 0.5 pad 1)
  other vias: 84.45,83.19
N$167  (via drill 0.5 pad 1)
  other vias: 85.72,83.19
N$168  (via drill 0.5 pad 1)
  other vias: 85.72,84.45
N$169  (via drill 0.5 pad 1)
  other vias: 84.45,84.45
N$170  (via drill 0.5 pad 1)
  other vias: 83.19,84.45
N$171  (via drill 0.5 pad 1)
  other vias: 81.92,84.45
N$173  (via drill 0.5 pad 1)
  other vias: 76.83,85.72
N$174  (via drill 0.5 pad 1)
  other vias: 78.11,85.72
N$175  (via drill 0.5 pad 1)
  other vias: 78.11,87
N$176  (via drill 0.5 pad 1)
  other vias: 76.83,87
N$177  (via drill 0.5 pad 1)
  other vias: 76.83,88.27
N$178  (via drill 0.5 pad 1)
  other vias: 78.11,88.27
N$179  (via drill 0.5 pad 1)
  other vias: 78.11,89.53
N$180  (via drill 0.5 pad 1)
  other vias: 76.83,89.53
N$181  (via drill 0.5 pad 1)
  other vias: 79.38,85.72
N$182  (via drill 0.5 pad 1)
  other vias: 80.64,85.72
N$183  (via drill 0.5 pad 1)
  other vias: 80.64,87
N$184  (via drill 0.5 pad 1)
  other vias: 79.38,87
N$185  (via drill 0.5 pad 1)
  other vias: 81.92,85.72
N$186  (via drill 0.5 pad 1)
  other vias: 83.19,85.72
N$187  (via drill 0.5 pad 1)
  other vias: 84.45,85.72
N$188  (via drill 0.5 pad 1)
  other vias: 85.72,85.72
N$189  (via drill 0.5 pad 1)
  other vias: 85.72,87
N$190  (via drill 0.5 pad 1)
  other vias: 84.45,87
N$191  (via drill 0.5 pad 1)
  other vias: 83.19,87
N$192  (via drill 0.5 pad 1)
  other vias: 81.92,87
N$193  (via drill 0.5 pad 1)
  other vias: 79.38,88.27
N$194  (via drill 0.5 pad 1)
  other vias: 80.64,88.27
N$195  (via drill 0.5 pad 1)
  other vias: 80.64,89.53
N$196  (via drill 0.5 pad 1)
  other vias: 79.38,89.53
N$197  (via drill 0.5 pad 1)
  other vias: 81.92,88.27
N$198  (via drill 0.5 pad 1)
  other vias: 83.19,88.27
N$199  (via drill 0.5 pad 1)
  other vias: 84.45,88.27
N$200  (via drill 0.5 pad 1)
  other vias: 85.72,88.27
N$201  (via drill 0.5 pad 1)
  other vias: 85.72,89.53
N$202  (via drill 0.5 pad 1)
  other vias: 84.45,89.53
N$203  (via drill 0.5 pad 1)
  other vias: 83.19,89.53
N$204  (via drill 0.5 pad 1)
  other vias: 81.92,89.53
N$205  (via drill 0.5 pad 1)
  other vias: 87,71.75
N$206  (via drill 0.5 pad 1)
  other vias: 87,73.03
N$207  (via drill 0.5 pad 1)
  other vias: 88.27,73.03
N$208  (via drill 0.5 pad 1)
  other vias: 88.27,74.3
N$209  (via drill 0.5 pad 1)
  other vias: 87,74.3
N$210  (via drill 0.5 pad 1)
  other vias: 87,75.56
N$211  (via drill 0.5 pad 1)
  other vias: 88.27,75.56
N$212  (via drill 0.5 pad 1)
  other vias: 88.27,76.83
N$213  (via drill 0.5 pad 1)
  other vias: 87,76.83
N$214  (via drill 0.5 pad 1)
  other vias: 87,78.11
N$215  (via drill 0.5 pad 1)
  other vias: 88.27,78.11
N$216  (via drill 0.5 pad 1)
  other vias: 88.27,79.38
N$217  (via drill 0.5 pad 1)
  other vias: 87,79.38
N$218  (via drill 0.5 pad 1)
  other vias: 87,80.64
N$219  (via drill 0.5 pad 1)
  other vias: 88.27,80.64
N$220  (via drill 0.5 pad 1)
  other vias: 88.27,81.92
N$221  (via drill 0.5 pad 1)
  other vias: 87,81.92
N$222  (via drill 0.5 pad 1)
  other vias: 87,83.19
N$223  (via drill 0.5 pad 1)
  other vias: 88.27,83.19
N$224  (via drill 0.5 pad 1)
  other vias: 88.27,84.45
N$225  (via drill 0.5 pad 1)
  other vias: 87,84.45
N$226  (via drill 0.5 pad 1)
  other vias: 87,85.72
N$227  (via drill 0.5 pad 1)
  other vias: 88.27,85.72
N$228  (via drill 0.5 pad 1)
  other vias: 88.27,87
N$229  (via drill 0.5 pad 1)
  other vias: 87,87
N$230  (via drill 0.5 pad 1)
  other vias: 87,88.27
N$231  (via drill 0.5 pad 1)
  other vias: 88.27,88.27
N$232  (via drill 0.5 pad 1)
  other vias: 88.27,89.53
N$233  (via drill 0.5 pad 1)
  other vias: 46.35,70.48
N$234  (via drill 0.5 pad 1)
  other vias: 47.62,70.48
N$235  (via drill 0.5 pad 1)
  other vias: 47.62,71.75
N$236  (via drill 0.5 pad 1)
  other vias: 46.35,71.75
N$237  (via drill 0.5 pad 1)
  other vias: 46.35,73.03
N$238  (via drill 0.5 pad 1)
  other vias: 47.62,73.03
N$239  (via drill 0.5 pad 1)
  other vias: 47.62,74.3
N$240  (via drill 0.5 pad 1)
  other vias: 46.35,74.3
N$241  (via drill 0.5 pad 1)
  other vias: 48.9,70.48
N$242  (via drill 0.5 pad 1)
  other vias: 50.16,70.48
N$243  (via drill 0.5 pad 1)
  other vias: 51.44,70.48
N$244  (via drill 0.5 pad 1)
  other vias: 52.7,70.48
N$245  (via drill 0.5 pad 1)
  other vias: 52.7,71.75
N$246  (via drill 0.5 pad 1)
  other vias: 51.44,71.75
N$247  (via drill 0.5 pad 1)
  other vias: 50.16,71.75
N$248  (via drill 0.5 pad 1)
  other vias: 48.9,71.75
N$249  (via drill 0.5 pad 1)
  other vias: 48.9,73.03
N$250  (via drill 0.5 pad 1)
  other vias: 50.16,73.03
N$251  (via drill 0.5 pad 1)
  other vias: 51.44,73.03
N$252  (via drill 0.5 pad 1)
  other vias: 52.7,73.03
N$253  (via drill 0.5 pad 1)
  other vias: 52.7,74.3
N$254  (via drill 0.5 pad 1)
  other vias: 51.44,74.3
N$255  (via drill 0.5 pad 1)
  other vias: 50.16,74.3
N$256  (via drill 0.5 pad 1)
  other vias: 48.9,74.3
N$257  (via drill 0.5 pad 1)
  other vias: 46.35,75.56
N$258  (via drill 0.5 pad 1)
  other vias: 47.62,75.56
N$259  (via drill 0.5 pad 1)
  other vias: 47.62,76.83
N$260  (via drill 0.5 pad 1)
  other vias: 46.35,76.83
N$261  (via drill 0.5 pad 1)
  other vias: 46.35,78.11
N$262  (via drill 0.5 pad 1)
  other vias: 47.62,78.11
N$263  (via drill 0.5 pad 1)
  other vias: 47.62,79.38
N$264  (via drill 0.5 pad 1)
  other vias: 46.35,79.38
N$265  (via drill 0.5 pad 1)
  other vias: 48.9,75.56
N$266  (via drill 0.5 pad 1)
  other vias: 50.16,75.56
N$267  (via drill 0.5 pad 1)
  other vias: 51.44,75.56
N$268  (via drill 0.5 pad 1)
  other vias: 52.7,75.56
N$269  (via drill 0.5 pad 1)
  other vias: 52.7,76.83
N$270  (via drill 0.5 pad 1)
  other vias: 51.44,76.83
N$271  (via drill 0.5 pad 1)
  other vias: 50.16,76.83
N$272  (via drill 0.5 pad 1)
  other vias: 48.9,76.83
N$273  (via drill 0.5 pad 1)
  other vias: 48.9,78.11
N$274  (via drill 0.5 pad 1)
  other vias: 50.16,78.11
N$275  (via drill 0.5 pad 1)
  other vias: 51.44,78.11
N$276  (via drill 0.5 pad 1)
  other vias: 52.7,78.11
N$277  (via drill 0.5 pad 1)
  other vias: 52.7,79.38
N$278  (via drill 0.5 pad 1)
  other vias: 51.44,79.38
N$279  (via drill 0.5 pad 1)
  other vias: 50.16,79.38
N$280  (via drill 0.5 pad 1)
  other vias: 48.9,79.38
N$281  (via drill 0.5 pad 1)
  other vias: 46.35,80.64
N$282  (via drill 0.5 pad 1)
  other vias: 47.62,80.64
N$283  (via drill 0.5 pad 1)
  other vias: 47.62,81.92
N$284  (via drill 0.5 pad 1)
  other vias: 46.35,81.92
N$285  (via drill 0.5 pad 1)
  other vias: 46.35,83.19
N$286  (via drill 0.5 pad 1)
  other vias: 47.62,83.19
N$287  (via drill 0.5 pad 1)
  other vias: 47.62,84.45
N$288  (via drill 0.5 pad 1)
  other vias: 46.35,84.45
N$289  (via drill 0.5 pad 1)
  other vias: 48.9,80.64
N$290  (via drill 0.5 pad 1)
  other vias: 50.16,80.64
N$291  (via drill 0.5 pad 1)
  other vias: 51.44,80.64
N$292  (via drill 0.5 pad 1)
  other vias: 52.7,80.64
N$293  (via drill 0.5 pad 1)
  other vias: 52.7,81.92
N$294  (via drill 0.5 pad 1)
  other vias: 51.44,81.92
N$295  (via drill 0.5 pad 1)
  other vias: 50.16,81.92
N$296  (via drill 0.5 pad 1)
  other vias: 48.9,81.92
N$297  (via drill 0.5 pad 1)
  other vias: 48.9,83.19
N$298  (via drill 0.5 pad 1)
  other vias: 50.16,83.19
N$299  (via drill 0.5 pad 1)
  other vias: 51.44,83.19
N$300  (via drill 0.5 pad 1)
  other vias: 52.7,83.19
N$301  (via drill 0.5 pad 1)
  other vias: 52.7,84.45
N$302  (via drill 0.5 pad 1)
  other vias: 51.44,84.45
N$303  (via drill 0.5 pad 1)
  other vias: 50.16,84.45
N$304  (via drill 0.5 pad 1)
  other vias: 48.9,84.45
N$305  (via drill 0.5 pad 1)
  other vias: 87,89.53
N$307  (via drill 0.5 pad 1)
  other vias: 38.73,67.94
N$308  (via drill 0.5 pad 1)
  other vias: 40.01,67.94
N$309  (via drill 0.5 pad 1)
  other vias: 40.01,69.22
N$310  (via drill 0.5 pad 1)
  other vias: 38.73,69.22
N$311  (via drill 0.5 pad 1)
  other vias: 41.27,67.94
N$312  (via drill 0.5 pad 1)
  other vias: 42.55,67.94
N$315  (via drill 0.5 pad 1)
  other vias: 43.81,67.94
N$317  (via drill 0.5 pad 1)
  other vias: 45.09,67.94
N$318  (via drill 0.5 pad 1)
  other vias: 45.09,69.22
N$319  (via drill 0.5 pad 1)
  other vias: 43.81,69.22
N$320  (via drill 0.5 pad 1)
  other vias: 42.55,69.22
N$321  (via drill 0.5 pad 1)
  other vias: 41.27,69.22
N$322  (via drill 0.5 pad 1)
  other vias: 46.35,67.94
N$323  (via drill 0.5 pad 1)
  other vias: 47.62,67.94
N$324  (via drill 0.5 pad 1)
  other vias: 47.62,69.22
N$325  (via drill 0.5 pad 1)
  other vias: 46.35,69.22
N$326  (via drill 0.5 pad 1)
  other vias: 48.9,67.94
N$327  (via drill 0.5 pad 1)
  other vias: 50.16,67.94
N$328  (via drill 0.5 pad 1)
  other vias: 51.44,67.94
N$329  (via drill 0.5 pad 1)
  other vias: 52.7,67.94
N$330  (via drill 0.5 pad 1)
  other vias: 52.7,69.22
N$331  (via drill 0.5 pad 1)
  other vias: 51.44,69.22
N$332  (via drill 0.5 pad 1)
  other vias: 50.16,69.22
N$333  (via drill 0.5 pad 1)
  other vias: 48.9,69.22
N$334  (via drill 0.5 pad 1)
  other vias: 53.98,67.94
N$335  (via drill 0.5 pad 1)
  other vias: 55.24,67.94
N$336  (via drill 0.5 pad 1)
  other vias: 55.24,69.22
N$337  (via drill 0.5 pad 1)
  other vias: 53.98,69.22
N$338  (via drill 0.5 pad 1)
  other vias: 56.52,67.94
N$339  (via drill 0.5 pad 1)
  other vias: 57.78,67.94
N$340  (via drill 0.5 pad 1)
  other vias: 59.05,67.94
N$341  (via drill 0.5 pad 1)
  other vias: 60.33,67.94
N$342  (via drill 0.5 pad 1)
  other vias: 60.33,69.22
N$343  (via drill 0.5 pad 1)
  other vias: 59.05,69.22
N$344  (via drill 0.5 pad 1)
  other vias: 57.78,69.22
N$345  (via drill 0.5 pad 1)
  other vias: 56.52,69.22
N$346  (via drill 0.5 pad 1)
  other vias: 61.59,67.94
N$347  (via drill 0.5 pad 1)
  other vias: 62.87,67.94
N$348  (via drill 0.5 pad 1)
  other vias: 62.87,69.22
N$349  (via drill 0.5 pad 1)
  other vias: 61.59,69.22
N$350  (via drill 0.5 pad 1)
  other vias: 64.14,67.94
N$351  (via drill 0.5 pad 1)
  other vias: 65.41,67.94
N$352  (via drill 0.5 pad 1)
  other vias: 66.67,67.94
N$353  (via drill 0.5 pad 1)
  other vias: 67.94,67.94
N$354  (via drill 0.5 pad 1)
  other vias: 67.94,69.22
N$355  (via drill 0.5 pad 1)
  other vias: 66.67,69.22
N$356  (via drill 0.5 pad 1)
  other vias: 65.41,69.22
N$357  (via drill 0.5 pad 1)
  other vias: 64.14,69.22
N$358  (via drill 0.5 pad 1)
  other vias: 69.22,67.94
N$359  (via drill 0.5 pad 1)
  other vias: 70.48,67.94
N$360  (via drill 0.5 pad 1)
  other vias: 70.48,69.22
N$361  (via drill 0.5 pad 1)
  other vias: 69.22,69.22
N$362  (via drill 0.5 pad 1)
  other vias: 71.75,67.94
N$363  (via drill 0.5 pad 1)
  other vias: 73.03,67.94
N$364  (via drill 0.5 pad 1)
  other vias: 74.3,67.94
N$365  (via drill 0.5 pad 1)
  other vias: 75.56,67.94
N$366  (via drill 0.5 pad 1)
  other vias: 75.56,69.22
N$367  (via drill 0.5 pad 1)
  other vias: 74.3,69.22
N$368  (via drill 0.5 pad 1)
  other vias: 73.03,69.22
N$369  (via drill 0.5 pad 1)
  other vias: 71.75,69.22
N$370  (via drill 0.5 pad 1)
  other vias: 76.83,67.94
N$371  (via drill 0.5 pad 1)
  other vias: 78.11,67.94
N$372  (via drill 0.5 pad 1)
  other vias: 78.11,69.22
N$373  (via drill 0.5 pad 1)
  other vias: 76.83,69.22
N$374  (via drill 0.5 pad 1)
  other vias: 79.38,67.94
N$375  (via drill 0.5 pad 1)
  other vias: 80.64,67.94
N$376  (via drill 0.5 pad 1)
  other vias: 80.64,69.22
N$377  (via drill 0.5 pad 1)
  other vias: 53.98,70.48
N$378  (via drill 0.5 pad 1)
  other vias: 55.24,70.48
N$379  (via drill 0.5 pad 1)
  other vias: 55.24,71.75
N$380  (via drill 0.5 pad 1)
  other vias: 53.98,71.75
N$381  (via drill 0.5 pad 1)
  other vias: 53.98,73.03
N$382  (via drill 0.5 pad 1)
  other vias: 55.24,73.03
N$383  (via drill 0.5 pad 1)
  other vias: 55.24,74.3
N$384  (via drill 0.5 pad 1)
  other vias: 53.98,74.3
N$385  (via drill 0.5 pad 1)
  other vias: 56.52,70.48
N$386  (via drill 0.5 pad 1)
  other vias: 57.78,70.48
N$387  (via drill 0.5 pad 1)
  other vias: 59.05,70.48
N$388  (via drill 0.5 pad 1)
  other vias: 60.33,70.48
N$389  (via drill 0.5 pad 1)
  other vias: 60.33,71.75
N$390  (via drill 0.5 pad 1)
  other vias: 59.05,71.75
N$391  (via drill 0.5 pad 1)
  other vias: 57.78,71.75
N$392  (via drill 0.5 pad 1)
  other vias: 56.52,71.75
N$393  (via drill 0.5 pad 1)
  other vias: 56.52,73.03
N$394  (via drill 0.5 pad 1)
  other vias: 57.78,73.03
N$395  (via drill 0.5 pad 1)
  other vias: 59.05,73.03
N$396  (via drill 0.5 pad 1)
  other vias: 60.33,73.03
N$397  (via drill 0.5 pad 1)
  other vias: 60.33,74.3
N$398  (via drill 0.5 pad 1)
  other vias: 59.05,74.3
N$399  (via drill 0.5 pad 1)
  other vias: 57.78,74.3
N$400  (via drill 0.5 pad 1)
  other vias: 56.52,74.3
N$401  (via drill 0.5 pad 1)
  other vias: 53.98,75.56
N$402  (via drill 0.5 pad 1)
  other vias: 55.24,75.56
N$403  (via drill 0.5 pad 1)
  other vias: 55.24,76.83
N$404  (via drill 0.5 pad 1)
  other vias: 53.98,76.83
N$405  (via drill 0.5 pad 1)
  other vias: 53.98,78.11
N$406  (via drill 0.5 pad 1)
  other vias: 55.24,78.11
N$407  (via drill 0.5 pad 1)
  other vias: 55.24,79.38
N$408  (via drill 0.5 pad 1)
  other vias: 53.98,79.38
N$409  (via drill 0.5 pad 1)
  other vias: 56.52,75.56
N$410  (via drill 0.5 pad 1)
  other vias: 57.78,75.56
N$411  (via drill 0.5 pad 1)
  other vias: 59.05,75.56
N$412  (via drill 0.5 pad 1)
  other vias: 60.33,75.56
N$413  (via drill 0.5 pad 1)
  other vias: 60.33,76.83
N$414  (via drill 0.5 pad 1)
  other vias: 59.05,76.83
N$415  (via drill 0.5 pad 1)
  other vias: 57.78,76.83
N$416  (via drill 0.5 pad 1)
  other vias: 56.52,76.83
N$417  (via drill 0.5 pad 1)
  other vias: 56.52,78.11
N$418  (via drill 0.5 pad 1)
  other vias: 57.78,78.11
N$419  (via drill 0.5 pad 1)
  other vias: 59.05,78.11
N$420  (via drill 0.5 pad 1)
  other vias: 60.33,78.11
N$421  (via drill 0.5 pad 1)
  other vias: 60.33,79.38
N$422  (via drill 0.5 pad 1)
  other vias: 59.05,79.38
N$423  (via drill 0.5 pad 1)
  other vias: 57.78,79.38
N$424  (via drill 0.5 pad 1)
  other vias: 56.52,79.38
N$425  (via drill 0.5 pad 1)
  other vias: 53.98,80.64
N$426  (via drill 0.5 pad 1)
  other vias: 55.24,80.64
N$427  (via drill 0.5 pad 1)
  other vias: 55.24,81.92
N$428  (via drill 0.5 pad 1)
  other vias: 53.98,81.92
N$429  (via drill 0.5 pad 1)
  other vias: 53.98,83.19
N$430  (via drill 0.5 pad 1)
  other vias: 55.24,83.19
N$431  (via drill 0.5 pad 1)
  other vias: 55.24,84.45
N$432  (via drill 0.5 pad 1)
  other vias: 53.98,84.45
N$433  (via drill 0.5 pad 1)
  other vias: 56.52,80.64
N$434  (via drill 0.5 pad 1)
  other vias: 57.78,80.64
N$435  (via drill 0.5 pad 1)
  other vias: 59.05,80.64
N$436  (via drill 0.5 pad 1)
  other vias: 60.33,80.64
N$437  (via drill 0.5 pad 1)
  other vias: 60.33,81.92
N$438  (via drill 0.5 pad 1)
  other vias: 59.05,81.92
N$439  (via drill 0.5 pad 1)
  other vias: 57.78,81.92
N$440  (via drill 0.5 pad 1)
  other vias: 56.52,81.92
N$441  (via drill 0.5 pad 1)
  other vias: 56.52,83.19
N$442  (via drill 0.5 pad 1)
  other vias: 57.78,83.19
N$443  (via drill 0.5 pad 1)
  other vias: 59.05,83.19
N$444  (via drill 0.5 pad 1)
  other vias: 60.33,83.19
N$445  (via drill 0.5 pad 1)
  other vias: 60.33,84.45
N$446  (via drill 0.5 pad 1)
  other vias: 59.05,84.45
N$447  (via drill 0.5 pad 1)
  other vias: 57.78,84.45
N$448  (via drill 0.5 pad 1)
  other vias: 56.52,84.45
N$449  (via drill 0.5 pad 1)
  other vias: 79.38,69.22
N$450  (via drill 0.5 pad 1)
  other vias: 81.92,67.94
N$451  (via drill 0.5 pad 1)
  other vias: 83.19,67.94
N$452  (via drill 0.5 pad 1)
  other vias: 84.45,67.94
N$453  (via drill 0.5 pad 1)
  other vias: 85.72,67.94
N$454  (via drill 0.5 pad 1)
  other vias: 85.72,69.22
N$455  (via drill 0.5 pad 1)
  other vias: 84.45,69.22
N$456  (via drill 0.5 pad 1)
  other vias: 83.19,69.22
N$457  (via drill 0.5 pad 1)
  other vias: 81.92,69.22
N$458  (via drill 0.5 pad 1)
  other vias: 87,67.94
N$459  (via drill 0.5 pad 1)
  other vias: 88.27,67.94
N$460  (via drill 0.5 pad 1)
  other vias: 88.27,69.22
N$461  (via drill 0.5 pad 1)
  other vias: 87,69.22
N$521  (via drill 0.5 pad 1)
  other vias: 61.59,70.48
N$522  (via drill 0.5 pad 1)
  other vias: 62.87,70.48
N$523  (via drill 0.5 pad 1)
  other vias: 62.87,71.75
N$524  (via drill 0.5 pad 1)
  other vias: 61.59,71.75
N$525  (via drill 0.5 pad 1)
  other vias: 61.59,73.03
N$526  (via drill 0.5 pad 1)
  other vias: 62.87,73.03
N$527  (via drill 0.5 pad 1)
  other vias: 62.87,74.3
N$528  (via drill 0.5 pad 1)
  other vias: 61.59,74.3
N$529  (via drill 0.5 pad 1)
  other vias: 64.14,70.48
N$530  (via drill 0.5 pad 1)
  other vias: 65.41,70.48
N$531  (via drill 0.5 pad 1)
  other vias: 66.67,70.48
N$532  (via drill 0.5 pad 1)
  other vias: 67.94,70.48
N$533  (via drill 0.5 pad 1)
  other vias: 67.94,71.75
N$534  (via drill 0.5 pad 1)
  other vias: 66.67,71.75
N$535  (via drill 0.5 pad 1)
  other vias: 65.41,71.75
N$536  (via drill 0.5 pad 1)
  other vias: 64.14,71.75
N$537  (via drill 0.5 pad 1)
  other vias: 64.14,73.03
N$538  (via drill 0.5 pad 1)
  other vias: 65.41,73.03
N$539  (via drill 0.5 pad 1)
  other vias: 66.67,73.03
N$540  (via drill 0.5 pad 1)
  other vias: 67.94,73.03
N$541  (via drill 0.5 pad 1)
  other vias: 67.94,74.3
N$542  (via drill 0.5 pad 1)
  other vias: 66.67,74.3
N$543  (via drill 0.5 pad 1)
  other vias: 65.41,74.3
N$544  (via drill 0.5 pad 1)
  other vias: 64.14,74.3
N$545  (via drill 0.5 pad 1)
  other vias: 61.59,75.56
N$546  (via drill 0.5 pad 1)
  other vias: 62.87,75.56
N$547  (via drill 0.5 pad 1)
  other vias: 62.87,76.83
N$548  (via drill 0.5 pad 1)
  other vias: 61.59,76.83
N$549  (via drill 0.5 pad 1)
  other vias: 61.59,78.11
N$550  (via drill 0.5 pad 1)
  other vias: 62.87,78.11
N$551  (via drill 0.5 pad 1)
  other vias: 62.87,79.38
N$552  (via drill 0.5 pad 1)
  other vias: 61.59,79.38
N$553  (via drill 0.5 pad 1)
  other vias: 64.14,75.56
N$554  (via drill 0.5 pad 1)
  other vias: 65.41,75.56
N$555  (via drill 0.5 pad 1)
  other vias: 66.67,75.56
N$556  (via drill 0.5 pad 1)
  other vias: 67.94,75.56
N$557  (via drill 0.5 pad 1)
  other vias: 67.94,76.83
N$558  (via drill 0.5 pad 1)
  other vias: 66.67,76.83
N$559  (via drill 0.5 pad 1)
  other vias: 65.41,76.83
N$560  (via drill 0.5 pad 1)
  other vias: 64.14,76.83
N$561  (via drill 0.5 pad 1)
  other vias: 64.14,78.11
N$562  (via drill 0.5 pad 1)
  other vias: 65.41,78.11
N$563  (via drill 0.5 pad 1)
  other vias: 66.67,78.11
N$564  (via drill 0.5 pad 1)
  other vias: 67.94,78.11
N$565  (via drill 0.5 pad 1)
  other vias: 67.94,79.38
N$566  (via drill 0.5 pad 1)
  other vias: 66.67,79.38
N$567  (via drill 0.5 pad 1)
  other vias: 65.41,79.38
N$568  (via drill 0.5 pad 1)
  other vias: 64.14,79.38
N$569  (via drill 0.5 pad 1)
  other vias: 61.59,80.64
N$570  (via drill 0.5 pad 1)
  other vias: 62.87,80.64
N$571  (via drill 0.5 pad 1)
  other vias: 62.87,81.92
N$572  (via drill 0.5 pad 1)
  other vias: 61.59,81.92
N$573  (via drill 0.5 pad 1)
  other vias: 61.59,83.19
N$574  (via drill 0.5 pad 1)
  other vias: 62.87,83.19
N$575  (via drill 0.5 pad 1)
  other vias: 62.87,84.45
N$576  (via drill 0.5 pad 1)
  other vias: 61.59,84.45
N$577  (via drill 0.5 pad 1)
  other vias: 64.14,80.64
N$578  (via drill 0.5 pad 1)
  other vias: 65.41,80.64
N$579  (via drill 0.5 pad 1)
  other vias: 66.67,80.64
N$580  (via drill 0.5 pad 1)
  other vias: 67.94,80.64
N$581  (via drill 0.5 pad 1)
  other vias: 67.94,81.92
N$582  (via drill 0.5 pad 1)
  other vias: 66.67,81.92
N$583  (via drill 0.5 pad 1)
  other vias: 65.41,81.92
N$584  (via drill 0.5 pad 1)
  other vias: 64.14,81.92
N$585  (via drill 0.5 pad 1)
  other vias: 64.14,83.19
N$586  (via drill 0.5 pad 1)
  other vias: 65.41,83.19
N$587  (via drill 0.5 pad 1)
  other vias: 66.67,83.19
N$588  (via drill 0.5 pad 1)
  other vias: 67.94,83.19
N$589  (via drill 0.5 pad 1)
  other vias: 67.94,84.45
N$590  (via drill 0.5 pad 1)
  other vias: 66.67,84.45
N$591  (via drill 0.5 pad 1)
  other vias: 65.41,84.45
N$592  (via drill 0.5 pad 1)
  other vias: 64.14,84.45
N$665  (via drill 0.5 pad 1)
  other vias: 69.22,70.48
N$666  (via drill 0.5 pad 1)
  other vias: 70.48,70.48
N$667  (via drill 0.5 pad 1)
  other vias: 70.48,71.75
N$668  (via drill 0.5 pad 1)
  other vias: 69.22,71.75
N$669  (via drill 0.5 pad 1)
  other vias: 69.22,73.03
N$670  (via drill 0.5 pad 1)
  other vias: 70.48,73.03
N$671  (via drill 0.5 pad 1)
  other vias: 70.48,74.3
N$672  (via drill 0.5 pad 1)
  other vias: 69.22,74.3
N$673  (via drill 0.5 pad 1)
  other vias: 71.75,70.48
N$674  (via drill 0.5 pad 1)
  other vias: 73.03,70.48
N$675  (via drill 0.5 pad 1)
  other vias: 74.3,70.48
N$676  (via drill 0.5 pad 1)
  other vias: 75.56,70.48
N$677  (via drill 0.5 pad 1)
  other vias: 75.56,71.75
N$678  (via drill 0.5 pad 1)
  other vias: 74.3,71.75
N$679  (via drill 0.5 pad 1)
  other vias: 73.03,71.75
N$680  (via drill 0.5 pad 1)
  other vias: 71.75,71.75
N$681  (via drill 0.5 pad 1)
  other vias: 71.75,73.03
N$682  (via drill 0.5 pad 1)
  other vias: 73.03,73.03
N$683  (via drill 0.5 pad 1)
  other vias: 74.3,73.03
N$684  (via drill 0.5 pad 1)
  other vias: 75.56,73.03
N$685  (via drill 0.5 pad 1)
  other vias: 75.56,74.3
N$686  (via drill 0.5 pad 1)
  other vias: 74.3,74.3
N$687  (via drill 0.5 pad 1)
  other vias: 73.03,74.3
N$688  (via drill 0.5 pad 1)
  other vias: 71.75,74.3
N$689  (via drill 0.5 pad 1)
  other vias: 69.22,75.56
N$690  (via drill 0.5 pad 1)
  other vias: 70.48,75.56
N$691  (via drill 0.5 pad 1)
  other vias: 70.48,76.83
N$692  (via drill 0.5 pad 1)
  other vias: 69.22,76.83
N$693  (via drill 0.5 pad 1)
  other vias: 69.22,78.11
N$694  (via drill 0.5 pad 1)
  other vias: 70.48,78.11
N$695  (via drill 0.5 pad 1)
  other vias: 70.48,79.38
N$696  (via drill 0.5 pad 1)
  other vias: 69.22,79.38
N$697  (via drill 0.5 pad 1)
  other vias: 71.75,75.56
N$698  (via drill 0.5 pad 1)
  other vias: 73.03,75.56
N$699  (via drill 0.5 pad 1)
  other vias: 74.3,75.56
N$700  (via drill 0.5 pad 1)
  other vias: 75.56,75.56
N$701  (via drill 0.5 pad 1)
  other vias: 75.56,76.83
N$702  (via drill 0.5 pad 1)
  other vias: 74.3,76.83
N$703  (via drill 0.5 pad 1)
  other vias: 73.03,76.83
N$704  (via drill 0.5 pad 1)
  other vias: 71.75,76.83
N$705  (via drill 0.5 pad 1)
  other vias: 71.75,78.11
N$706  (via drill 0.5 pad 1)
  other vias: 73.03,78.11
N$707  (via drill 0.5 pad 1)
  other vias: 74.3,78.11
N$708  (via drill 0.5 pad 1)
  other vias: 75.56,78.11
N$709  (via drill 0.5 pad 1)
  other vias: 75.56,79.38
N$710  (via drill 0.5 pad 1)
  other vias: 74.3,79.38
N$711  (via drill 0.5 pad 1)
  other vias: 73.03,79.38
N$712  (via drill 0.5 pad 1)
  other vias: 71.75,79.38
N$713  (via drill 0.5 pad 1)
  other vias: 69.22,80.64
N$714  (via drill 0.5 pad 1)